# Altium PCB PCB-Jammer.PcbDoc
Units mm, origin at the board's own origin, x right, y up, seen from the top; angles counter-clockwise.
Board outline 140 x 250 mm, 2 copper layers (Top Layer, Bottom Layer); 89 components, 39 nets, 339 pads, 15 vias.
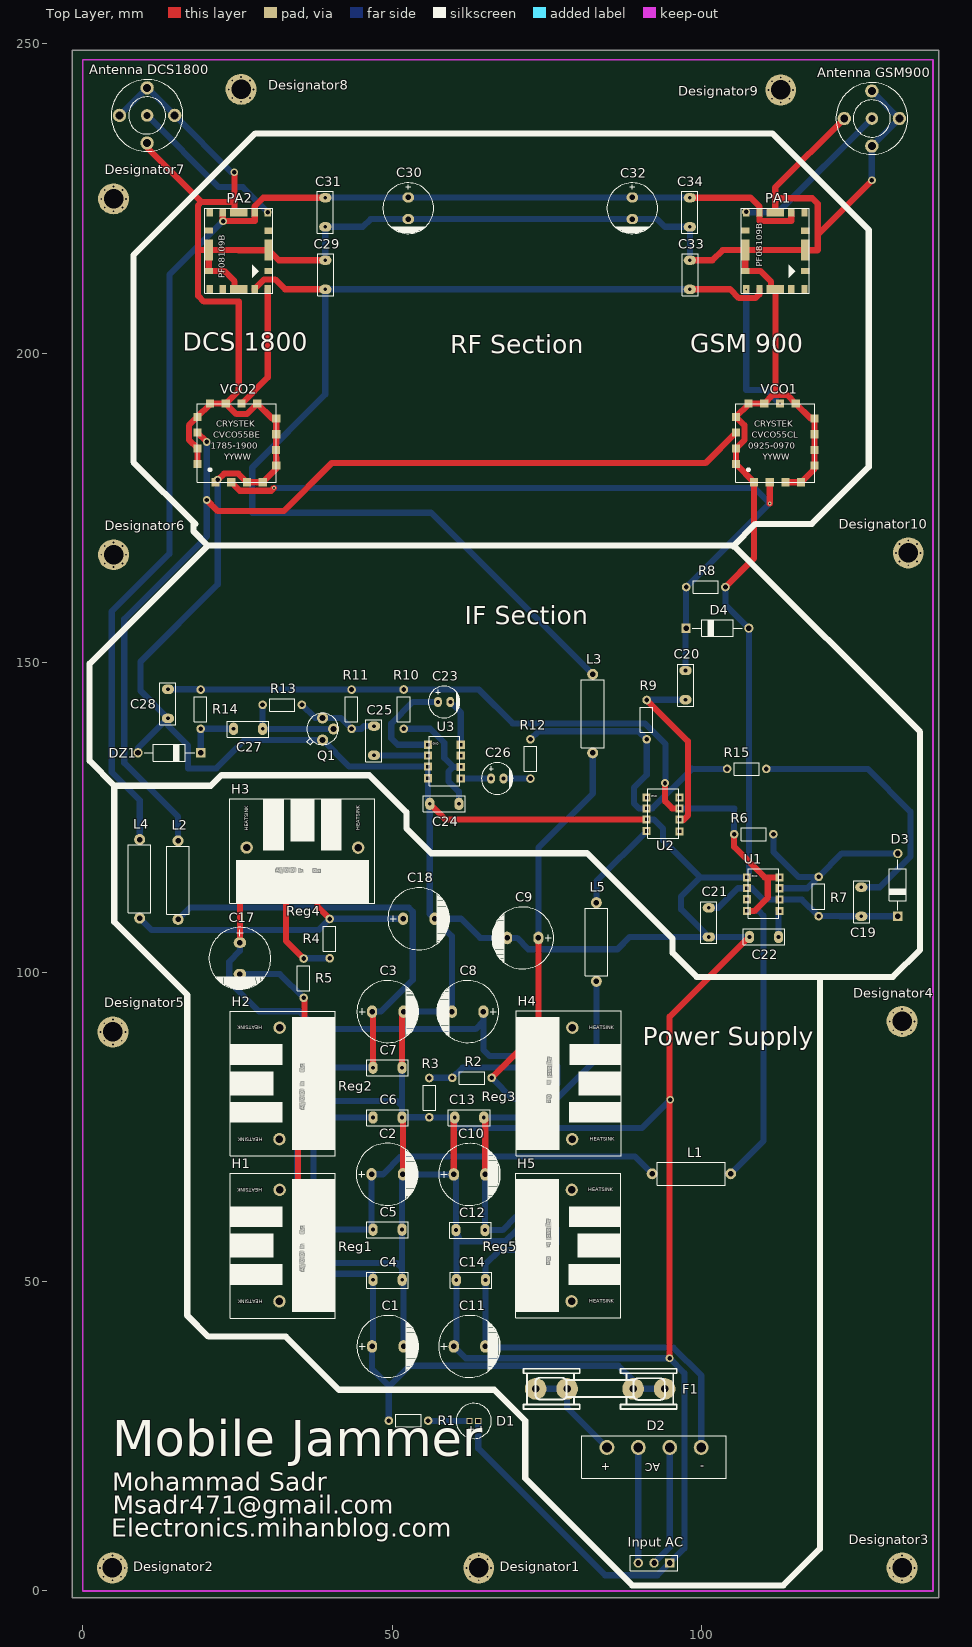
[diagram p0: Top Layer view]
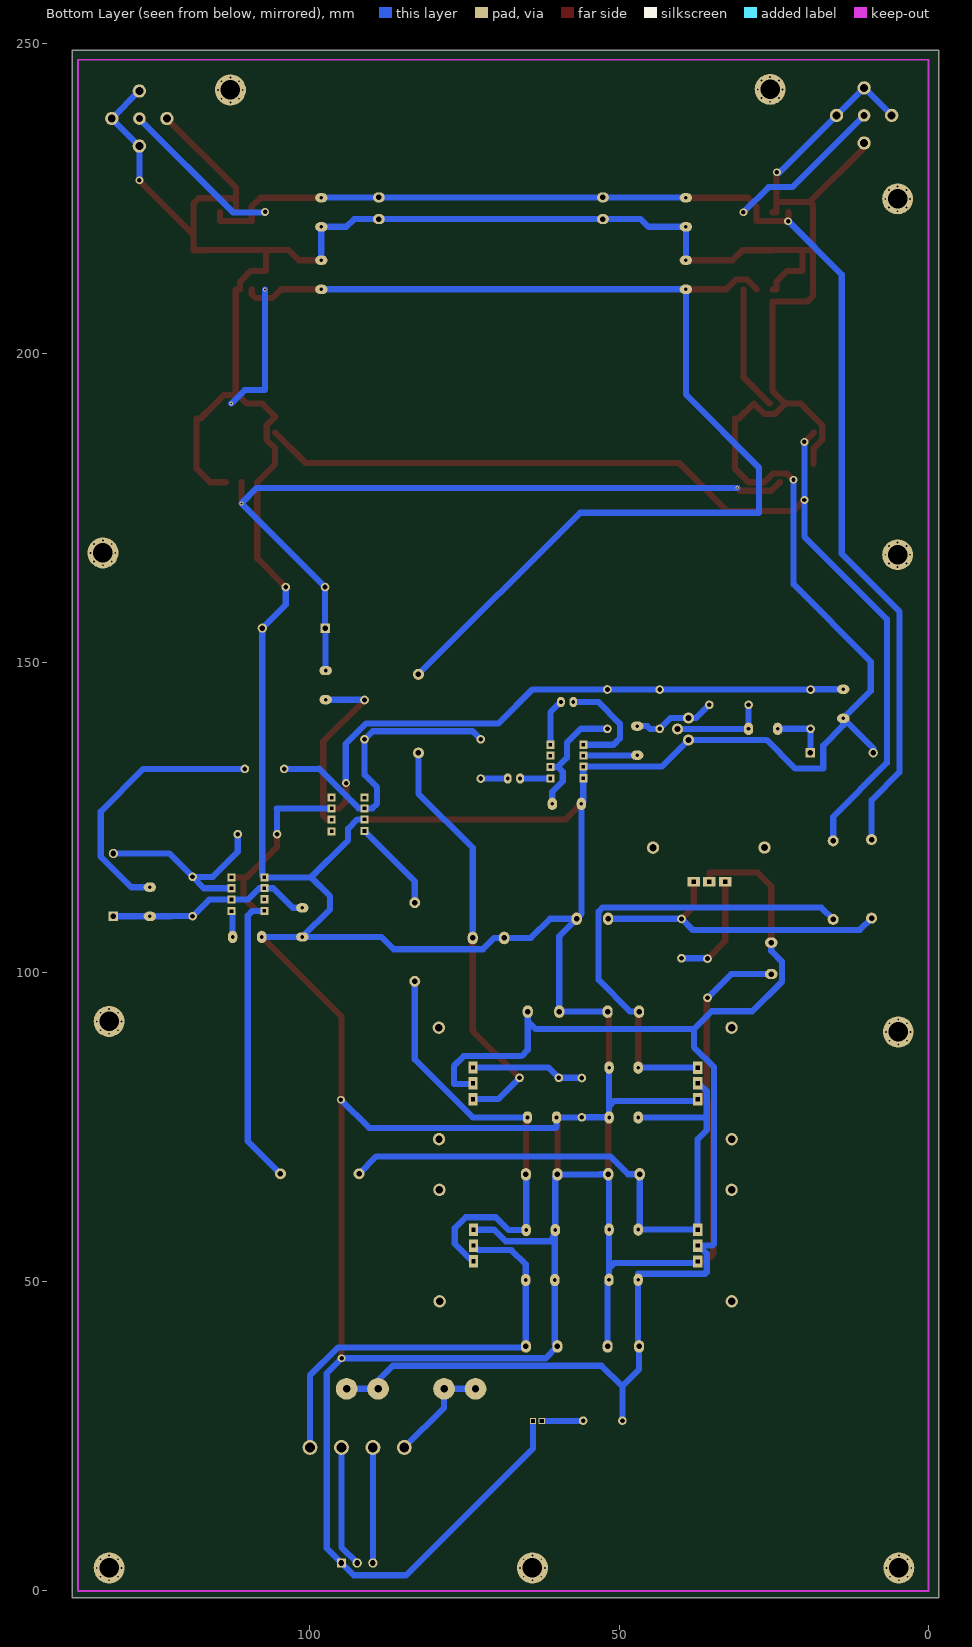
[diagram p1: Bottom Layer view, seen from below]
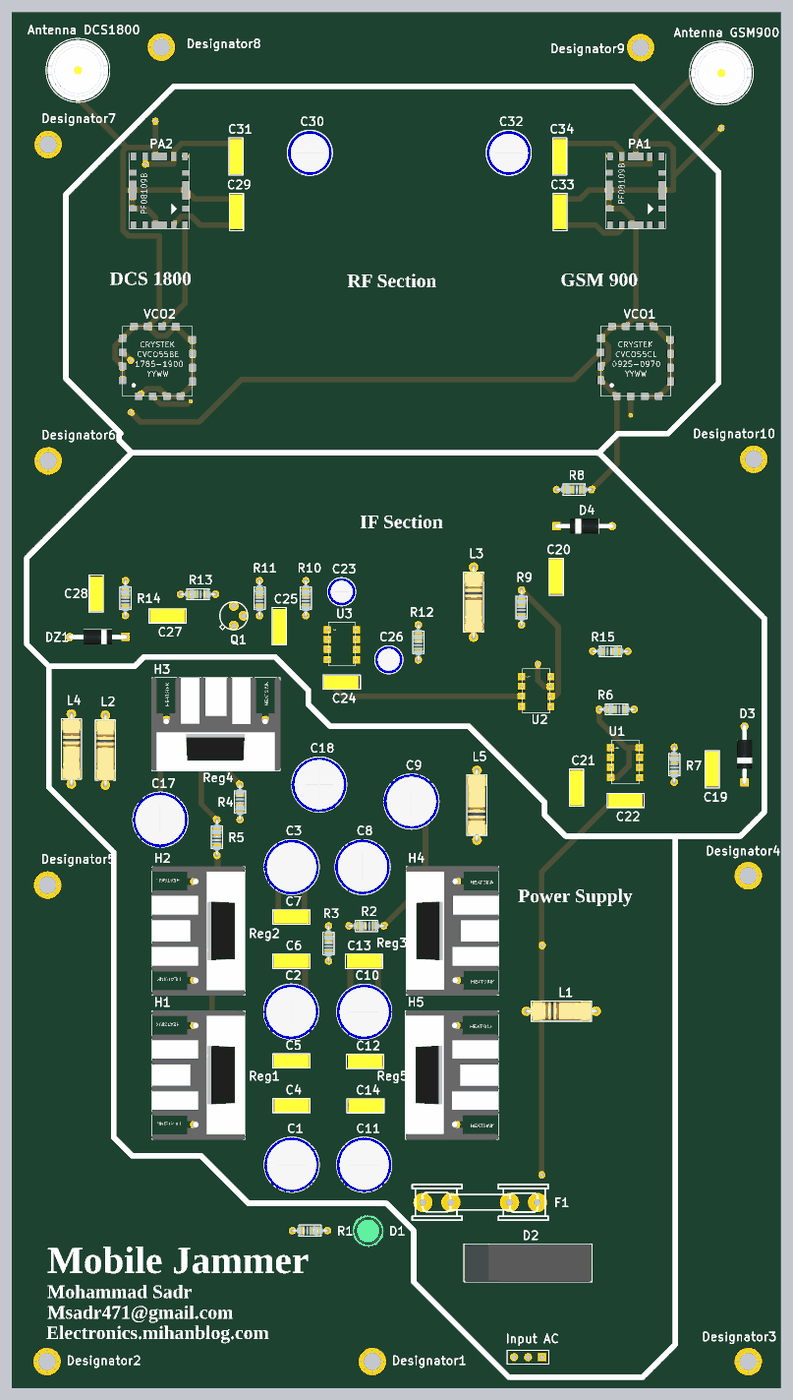
[diagram p2: 3D render of the assembled board from above, using the file's embedded part models]

## Layer stack, top to bottom
Top Solder: solder mask 0.0102, Solder Resist, Dk 3.5
Top Layer: signal copper 0.0356
Dielectric 1: dielectric 0.32, FR-4, Dk 4.8
Bottom Layer: signal copper 0.0356
Bottom Solder: solder mask 0.0102, Solder Resist, Dk 3.5

## Board outline
-1.674,-1.086 138.326,-1.086 138.326,248.914 -1.674,248.914

## Design rules (kind name [scope] priority, off if disabled: settings)
Clearance [All] p1: gap=0.2
PolygonConnect [All] p1: connectstyle=Relief reliefconductorwidth=0.254 reliefentries=4 polygonreliefangle="45 Angle" airgapwidth=0.254
RoomDefinition Jammer2 [InComponentClass('Jammer2')] p1: confinementstyle=ConfineIn formatcopy=TRUE lockcomponents=FALSE outline -0.214,-0.186 137.586,-0.186 137.586,247.614 -0.214,247.614
RoutingCorners [All] p1: cornerstyle=Round minsetback=3 maxsetback=3
RoutingPriority [All] p1: routingpriority=1
RoutingVias [All] p1: holewidth=0.3 width=0.6 viastyle="Through Hole" minholewidth=0.711 minwidth=1.27 maxholewidth=0.711 maxwidth=1.27
SMDNeckDown [All] p1: percent=100.000
SolderMaskExpansion [All] p1: expansion=0.102 useseparateexpansions=TRUE expansionbottom=0.102
Width [All] p1: maxlimit=1 minlimit=1 preferedwidth=1 minimp=50.000000 maximp=50.000000 favimp=50.000000
28 further rules are at their usual default settings.

## Classes and differential pairs
component class Jammer2: "Antenna DCS1800" "Antenna GSM900" C1 C3 C4 C5 C6 C7 C8 C9 C11 C12 C13 C14 C17 C18 C19 C20 C21 C22 C23 C24 C25 C26 C27 C28 C29 C30 C31 C32 C33 C34 D1 D2 D3 D4 DZ1 F1 H1 H2 H3 H4 H5 "Input AC" L1 L2 L3 L4 L5 PA1 PA2 Q1 R1 R2 R3 R4 R5 R6 R7 R8 R9 R10 R11 R12 R13 R14 R15 Reg1 Reg2 Reg3 Reg4 U1 U2 U3 VCO1 VCO2

## Components (designator, comment, footprint, x,y, rotation, side; value= is the part's Value field where it differs from the comment)
"Antenna DCS1800" "DCS1800" "BNC - Connector" 10.4,238.4 r90 top
"Antenna GSM900" "GSM900" "BNC - Connector" 127.5,237.9 r90 top
C1 "2200uF" "cap 04" 49.3,39.5 r180 top
C2 "2200uF" "cap 04" 49.2,67.322 r180 top
C3 "2200uF" "cap 04" 49.3,93.6 r180 top
C4 "330nF" "Cap - 100nF - 2" 46.91,50.27 r0 top
C5 "100nF" "Cap - 100nF - 2" 46.9,58.38 r0 top
C6 "330nF" "Cap - 100nF - 2" 46.9,76.5 r0 top
C7 "100nF" "Cap - 100nF - 2" 46.9,84.55 r0 top
C8 "100uF" "cap 04" 62.2,93.6 r0 top
C9 "100uF" "cap 04" 71.1,105.5 r0 top
C10 "2200uF" "cap 04" 62.5,67.3 r180 top
C11 "2200uF" "cap 04" 62.5,39.5 r180 top
C12 "100nF" "Cap - 100nF - 2" 60.3,58.3 r0 top
C13 "330nF" "Cap - 100nF - 2" 60.1,76.5 r0 top
C14 "330nF" "Cap - 100nF - 2" 60.37,50.23 r0 top
C17 "100uF" "cap 04" 25.4,102.2 r90 top
C18 "100uF" "cap 04" 54.3,108.6 r180 top
C19 "100nF" "Cap - 100nF - 2" 125.8,109 r90 top
C20 "100nF" "Cap - 100nF - 2" 97.4,144 r90 top
C21 "100nF" "Cap - 100nF - 2" 101.17,110.37 r270 top
C22 "10nF" "Cap - 100nF - 2" 112.43,105.67 r180 top
C23 "10uF" "cap 01" 58.39,143.63 r180 top
C24 "100nF" "Cap - 100nF - 2" 60.78,127.17 r180 top
C25 "100nF" "Cap - 100nF - 2" 47.06,139.73 r270 top
C26 "10uF" "cap 01" 66.98,131.27 r180 top
C27 "100nF" "Cap - 100nF - 2" 24.37,139.29 r0 top
C28 "100nF" "Cap - 100nF - 2" 13.77,145.68 r270 top
C29 "1nF" "Cap - 100nF - 2" 39.2,210.3 r90 top
C30 "470uF" "cap 03" 52.6,223.4 r90 top
C31 "100nF" "Cap - 100nF - 2" 39.2,225.1 r270 top
C32 "470uF" "cap 03" 88.8,223.4 r90 top
C33 "1nF" "Cap - 100nF - 2" 98.1,210.3 r90 top
C34 "100nF" "Cap - 100nF - 2" 98.1,225.1 r270 top
D1 "LED" "GREEN LED 5mm" 63.196,27.464 r270 top
D2 "Diode Bridge" "Diode Bridge" 92.31,23.184 r180 top
D3 "1N4007" DO-41 131.7,109 r270 top
D4 "1N4007" DO-41 97.48,155.56 r180 top
Designator1 "Comment" "Board Screw_No Silk" 63.986,3.714 r0 top
Designator2 "Comment" "Board Screw_No Silk" 4.786,3.714 r0 top
Designator3 "Comment" "Board Screw_No Silk" 132.386,3.714 r0 top
Designator4 "Comment" "Board Screw_No Silk" 132.386,92.014 r0 top
Designator5 "Comment" "Board Screw_No Silk" 4.886,90.314 r0 top
Designator6 "Comment" "Board Screw_No Silk" 4.986,167.414 r0 top
Designator7 "Comment" "Board Screw_No Silk" 4.986,224.914 r0 top
Designator8 "Comment" "Board Screw_No Silk" 25.586,242.614 r0 top
Designator9 "Comment" "Board Screw_No Silk" 112.786,242.514 r0 top
Designator10 "Comment" "Board Screw_No Silk" 133.386,167.714 r0 top
DZ1 "6.8V" DO-41 19.08,135.42 r0 top
F1 "FUSE" FUSE_1 78.266,32.654 r0 top
H1 "Heatsink" "Heatsink 2PIN" 31.8,55.8 r90 top
H2 "Heatsink" "Heatsink 2PIN" 31.8,82 r90 top
H3 "Heatsink" "Heatsink 2PIN" 35.5,120.1 r0 top
H4 "Heatsink" "Heatsink 2PIN" 79.1,82 r270 top
H5 "Heatsink" "Heatsink 2PIN" 79,55.8 r270 top
"Input AC" "Input AC" HDR1X3 94.85,4.515 r180 top
L1 "100uH" Res-(1/1) 92,67.4 r0 top
L2 "100uH" Res-(1/1) 15.4,121.2 r270 top
L3 "100uH" Res-(1/1) 82.4,148.1 r270 top
L4 "100uH" Res-(1/1) 9.2,121.4 r270 top
L5 "100uH" Res-(1/1) 83,98.5 r90 top
PA1 "PF08109B" RF-O-12 111.9,216.5 r90 top
PA2 "PF08109B" RF-O-12 25.2,216.5 r90 top
Q1 "2N2222A" TO52 38.76,139.27 r270 top
R1 "1K" Res-(1/4) 52.626,27.514 r0 top
R2 "100R" Res-(1/4) 62.9,82.9 r180 top
R3 "180R" Res-(1/4) 56,79.7 r90 top
R4 "160R" Res-(1/4) 39.9,105.4 r270 top
R5 "148R" Res-(1/4) 35.7,99 r90 top
R6 "700R" Res-(1/4) 108.426,122.264 r180 top
R7 "700R" Res-(1/4) 118.9,112.2 r90 top
R8 "82K" Res-(1/4) 100.67,162.2 r180 top
R9 "2K" Res-(1/4) 91.12,140.77 r90 top
R10 "10R" Res-(1/4) 51.87,142.47 r90 top
R11 "2K" Res-(1/4) 43.44,142.46 r90 top
R12 "1K" Res-(1/4) 72.34,134.43 r90 top
R13 "33K" Res-(1/4) 32.24,143.17 r180 top
R14 "2K" Res-(1/4) 19.05,142.46 r90 top
R15 "2K" Res-(1/4) 107.286,132.814 r0 top
Reg1 "L7812" TO-220 37.3,55.8 r90 top
Reg2 "L7805" TO-220 37.3,82 r90 top
Reg3 "LM317" TO-220 73.6,82 r270 top
Reg4 "LM317" TO-220 35.4,114.6 r0 top
Reg5 "L7912" TO-220 73.5,55.8 r270 top
U1 "NE555" DIP8 107.3,115.3 r0 top
U2 "LM741-UA741" DIP8 91.12,128.2 r0 top
U3 "LM386" DIP8 55.77,136.73 r0 top
VCO1 "CVCO55CL" CVCO55CL 111.9,185.5 r0 top
VCO2 "CVCO55BE" CVCO55BE 24.9,185.5 r0 top

## Footprints (in the part's own frame and the unit in brackets; to place one, negate y for a bottom-side part, rotate by r counter-clockwise, add the part's x,y. Pads: shape width x height; smd on the part's side, far side on the other; paste and mask are expansions set on the pad)
"BNC - Connector" [mil]
  round 80 hole 45: 1(0,0)
  round 85 hole 50: 2(-175.2,0) 2(0,175.2) 2(0,-175.2) 2(175.2,0)
  silkscreen extent -228,-228 228,228, body extent -218,-218 218,218, height 538
"Board Screw_No Silk" [mm]
  round 0.6 hole 0.3: S(-2,0) S(-1.414,-1.414) S(-1.414,1.414) S(0,-2) S(0,2) S(1.414,-1.414) S(1.414,1.414) S(2,0)
  round 5 hole 3.15 mask+0.1: S(0,0)
"cap 01" [mm]
  oval 1.27x1.651 hole 0.635: 1(1,0) 2(-1,0)
  silkscreen extent -2.55,-2.55 2.55,2.55, body extent -2.53,-2.53 2.53,2.53, height 12.54
"cap 03" [mil]
  oval 65x75 hole 35: 1(68.9,0) 2(-68.9,0)
  silkscreen extent -161,-161 161,161, body extent -159,-159 157,158, height 473
"cap 04" [mil]
  oval 65x80 hole 35: 1(100,0) 2(-100,0)
  silkscreen extent -197,-197 197,197, body extent -198,-197 198,199, height 513
"Cap - 100nF - 2" [mm]
  oval 1.5x2 hole 0.6: 1(0,0) 2(4.7,0)
  silkscreen extent -1.02,-1.33 5.72,1.24, body extent -0.75,-1.2 5.55,1.2, height 6.84
CVCO55BE [mm] "CVCO55BE-voltage controlled oscillator"
  rect 1.32x1.32 smd: 1(-3.44,-6.36) 2(-0.9,-6.36) 3(1.64,-6.36) 4(4.18,-6.36) 5(6.36,-3.68) 6(6.35,-1.15) 7(6.36,1.39) 8(6.36,3.93) 9(3.3,6.35) 10(0.76,6.35) 11(-1.78,6.35) 12(-4.32,6.36) 13(-6.36,4.19) 14(-6.36,1.65) 15(-6.34,-0.89) 16(-6.34,-3.44)
  silkscreen extent -6.36,-6.35 6.35,6.35
CVCO55CL [mm] "CVCO55CL-voltage controlled oscillator"
  rect 1.32x1.32 smd: 1(-3.44,-6.36) 2(-0.9,-6.36) 3(1.64,-6.36) 4(4.18,-6.36) 5(6.36,-3.68) 6(6.35,-1.15) 7(6.36,1.39) 8(6.36,3.93) 9(3.3,6.35) 10(0.76,6.35) 11(-1.78,6.35) 12(-4.32,6.36) 13(-6.36,4.19) 14(-6.36,1.65) 15(-6.34,-0.89) 16(-6.34,-3.44)
  silkscreen extent -6.36,-6.35 6.35,6.35
"Diode Bridge" [mil]
  round 95 hole 62: 1(300,0) 2(-100,0) 3(-300,0) 4(100,0)
  silkscreen extent -460,-75 460,195, body extent -455,-75 458,195, height 760
DIP8 [mm] "8PIN"
  rect 1.3x1.3 hole 0.5 square: 1(0,-0.013) 2(0,-1.758) 3(0,-3.541) 4(0,-5.42) 5(5.309,-5.461) 6(5.309,-3.586) 7(5.309,-1.768) 8(5.309,-0.013)
  silkscreen extent 0.19,-6.6 5.17,1.4, body extent -0.12,-6.6 5.45,1.4, height 3.47
DO-41 [mm] "Diode"
  round 1.5 hole 0.9: 1(-10.15,0)
  rect 1.5x1.5 hole 0.9: 2(0,0)
  silkscreen extent -9.11,-1.35 -0.97,1.35, body extent -10.58,-1.36 0.44,1.36, height 3.12
FUSE_1 [mm]
  round 3.5 hole 1.2: 1(0,0) 2(10.668,0) ""(-5.08,0) ""(15.748,0)
  silkscreen extent -7.04,-3.25 17.7,3.25
"GREEN LED 5mm" [mm] "GREEN LED 5mm"
  rect 1x1 hole 0.6 square: 1(0,-0.7) 2(0,0.7)
  silkscreen extent -2.84,-2.83 2.84,2.84, body extent -2.9,-2.9 2.9,2.9, height 13.5
HDR1X3 [mm] "Connector; Header; 3 Position"
  rect 1.5x1.5 hole 0.9: 1(0,0)
  round 1.5 hole 0.9: 2(2.54,0) 3(5.08,0)
  silkscreen extent -1.27,-1.27 6.35,1.27
"Heatsink 2PIN" [mm] "Heatsink"
  round 2 hole 1.2: ""(-9.005,0.015) ""(9.005,-0.015)
  silkscreen extent -11.71,-9.03 11.68,7.95, body extent -11.77,-9.03 11.73,7.98, height 25
Res-(1/1) [mil]
  round 70 hole 35: 1(0,0) 2(500,0)
  silkscreen extent 34,-72 466,72, body extent -10,-71 514,73, height 151
Res-(1/4) [mil]
  round 55 hole 30: 1(-125,0) 2(125,0)
  silkscreen extent -80,-40 80,40, body extent -135,-36 135,36, height 115
RF-O-12 [mm] "Power Amplifier"
  rect 1x1.4 smd: 1(-3.23,-4.85) 2(3.27,-4.85) 7(3.3,4.85) 8(-3.22,4.85)
  rect 1.4x1 smd: 3(6.26,-4.7) 4(6.26,-2.59) 5(6.25,2.57) 6(6.25,4.68) 9(-6.21,4.68) 10(-6.22,2.57) 11(-6.22,-2.59) 12(-6.22,-4.7)
  rect 3.4x1.4 smd: G1(0.12,-4.85) G3(0.14,4.85)
  rect 1.4x2.8 smd: G2(-6.22,-0.02) G4(6.26,-0.02)
  silkscreen extent -6.87,-5.5 6.89,5.5
TO52 [mm]
  round 1.8 hole 1: 1(1.778,0) 2(0,1.778) 3(-1.778,0)
  silkscreen extent -2.54,-2.54 2.54,2.54
TO-220 [mm] "Voltage Regolator"
  rect 2x1.5 hole 0.62 square: 1(-2.565,0) 2(0,0) 3(2.54,0)
  silkscreen extent -5.33,-1.65 5.31,3.23, body extent -5.34,-1.61 5.34,3.22, height 22.61

## Part data
"Antenna DCS1800": library part BNC, "Antenna DCS1800"
"Antenna GSM900": library part BNC, "Antenna GSM900"
C1 C2 C3 C8 C9 C10 C11 C17 C18 C23 C26 C30 C32: library part Cap-Polar, "Capacitor Electrolytic"
C4 C5 C6 C7 C12 C13 C14 C19 C20 C21 C22 C24 C25 C27 C28: library part Cap-Bipolar, "Capacitor Ceramic"
C29 C31 C33 C34: library part Cap-Bipolar, "Capacitor ceramic"
D1: library part "LED Full color"
D2: "Full Wave Diode Bridge"
D3 D4: "Rectifiers"
DZ1: library part 1N4728A, "Diode Zener"
"Input AC": library part "Header 3", "Header, 3-Pin"
L1 L2 L3 L4 L5: library part "Inductor Iron", "Magnetic-Core Inductor"
PA1 PA2: library part "Power Amplifier", "Power Amplifier"
Q1: "NPN Transistor_Created by DESIGNER (M.Hariri)"
R1 R2 R3 R4 R5: library part Resistor, "Resistor"
R6 R7 R8 R9 R10 R11 R12 R13 R14 R15: library part Resistor, "Resistor 1/4W"
Reg1 Reg2 Reg3 Reg4 Reg5: library part "Voltage Regulator", "TO-220"
U1: "GENERAL PURPOSE SINGLE BIPOLAR TIMERS"
U2: "(OP-AMP)"
U3: "Audio Amplifier"
VCO1: library part CVCO055CL, "SMD"
VCO2: library part CVCO055BE, "SMD"

## Via types
v1: diameter 1.27, hole 0.711, Top Layer to Bottom Layer, 11 vias
v2: diameter 0.6, hole 0.3, Top Layer to Bottom Layer, 4 vias

## Nets (pads, with @x,y where several pads share a name; then routed paths per layer and width w, separated by ;. In a path a pad name is that pad's centre, name@x,y a point inside that pad or via, vN(x,y) a via of type N, cw(c..) or ccw(c..) an arc to the next point about the centre after c; other vN are vias at no path point)
GND: "Antenna DCS1800.2" "Antenna GSM900.2" "Input AC.1" C1.2 C2.2 C3.2 C4.2 C5.2 C6.2 C7.2 C8.2 C9.2 C10.1 C11.1 C12.1 C13.1 C14.1 C17.2 C18.2 C21.2 C22.2 C24.2 C28.2 C29.2 C30.2 C31.2 C32.2 C33.2 C34.2 D1.2 D4.1 DZ1.1 PA1.8 PA1.G1 PA1.G2 PA1.G3 PA1.G4 PA2.8 PA2.G1 PA2.G2 PA2.G3 PA2.G4 Q1.1 R3.1 R5.1 R8.1 Reg1.1 Reg2.1 Reg5.1 U1.1 U2.3 U3.3 U3.4 VCO1.1 VCO1.3 VCO1.4 VCO1.5 VCO1.6 VCO1.7 VCO1.8 VCO1.9 VCO1.11 VCO1.12 VCO1.13 VCO1.15 VCO1.16 VCO2.1 VCO2.3 VCO2.4 VCO2.5 VCO2.6 VCO2.7 VCO2.8 VCO2.9 VCO2.11 VCO2.12 VCO2.13 VCO2.15 VCO2.16 | length 1179.3
  Top Layer w1: 10.4,233.95 10.4,233.2 19.186,224.414 ; VCO2.16 VCO2.15 17.166,186.004 17.166,188.316 VCO2.13 20.58,191.73 VCO2.12 ; VCO2.12@20.58,191.87 VCO2.11 ; VCO2.1@21.83,179.51 22.858,180.538 25.142,180.538 VCO2.3 VCO2.4 31.26,181.32 VCO2.5 31.26,183.079 ; v1@24.532,229.214 24.532,224.414 ; PA2.G2 24.532,210.28 24.532,211.578 22.83,213.28 PA2.8 PA2.G3 ; PA2.G4 24.532,222.76 24.532,224.414 ; 31.25,183.089 VCO2.6 31.25,185.593 ; 31.26,185.603 VCO2.7 VCO2.8 30.62,189.43 VCO2.9 26.49,190.14 24.83,190.14 VCO2.11 ; R5.1 35.835,95.825 35.835,80.715 Reg2.1@37.208,79.342 ; Reg1.1 35.975,53.235 34.786,54.424 34.786,78.104 35.876,79.194 37.06,79.194 Reg2.1@37.208,79.342 ; Reg2.1 Reg2.1@37.208,79.342 ; C29.2 31.67,215 PA2.G1 25.187,216.62 25.167,216.64 PA2.G3 ; C2.2@51.6,67.461 C2.2 51.74,76.36 C6.2 ; C7.2 51.6,93.36 C3.2 ; C24.2 58.591,124.659 U2.3 ; C10.1 59.96,76.36 C13.1 ; Reg5.1@73.5,58.111 Reg5.1 ; v1(94.826,37.584) 94.826,92.766 C22.2 C22.2@107.816,105.584 ; C33.2 101.748,215 103.388,216.64 PA1.G3 ; R8.1 108.46,166.815 VCO1.1 105.56,182.04 VCO1.16 VCO1.15 106.904,185.954 106.904,188.326 VCO1.13 107.58,191.73 VCO1.12 108.834,191.86 108.844,191.85 VCO1.11 111.502,193.232 111.92,193.232 ; PA1.G4 111.908,222.76 111.908,224.536 ; VCO1.3 VCO1.4 118.26,181.32 VCO1.5 118.26,183.079 ; PA1.G1 118.722,216.62 ; PA1.G1@116.75,216.64 PA1.G3 ; 118.25,183.089 VCO1.6 118.25,185.593 ; 118.26,185.603 VCO1.7 VCO1.8 117.62,189.43 VCO1.9 113.818,193.232 111.92,193.232 ; 118.759,216.657 118.759,219.114 ; 123.05,237.9 111.908,226.758 111.908,224.536 ; v1(127.5,227.928) 127.5,227.855 118.759,219.114 ; 18.639,216.64 18.639,209.261 19.586,208.314 25.22,208.314 25.22,193.95 VCO2.11 ; 18.639,216.64 18.639,223.867 19.186,224.414 ; 18.639,216.64 PA2.G3 ; 19.186,224.414 24.532,224.414 ; PA1.G3 PA1.8 109.469,213.28 111.222,211.527 111.222,210.28 PA1.G2 111.92,193.232 ; 111.908,224.536 112.386,225.014 117.886,225.014 118.759,224.141 118.759,219.114
  Bottom Layer w1: 5.95,238.4 10.4,242.85 14.85,238.4 24.036,229.214 v1(24.486,229.214) ; DZ1.1 8.93,136.14 C28.2@13.762,140.972 ; v1(21.806,179.534) 21.806,162.614 9.336,150.144 9.336,145.414 C28.2 ; C17.2 31.865,99.66 R5.1 ; Reg1.1 37.3,52.98 50.77,52.98 51.61,52.14 ; Reg2.1 37.3,79.167 50.77,79.167 51.6,78.337 ; C29.2 C31.2 45.258,220.4 46.508,221.65 C30.2 C32.2 92.807,221.65 94.057,220.4 C34.2 C33.2 ; C7.2 51.6,78.337 ; C1.2 51.84,50.04 C4.2 51.61,52.14 ; C3.2 C8.2 59.66,105.78 C18.2 ; D1.2 63.896,23.034 84.406,2.524 92.859,2.524 94.85,4.515 97.226,6.891 97.226,35.184 v1(94.826,37.584) 61.876,37.584 C11.1 60.37,39.91 C14.1 C12.1@60.37,58.1 ; Reg5.1 70.176,58.365 68.296,56.485 60.935,56.485 C12.1@60.37,58.1 ; U2.3 92.273,124.659 93.772,123.16 93.772,121.28 99.765,115.287 ; v1(94.936,79.364) 90.372,74.8 60.25,74.8 60.1,74.95 C13.1 56.025,76.5 R3.1 51.625,76.525 C6.2 51.6,78.337 ; R8.1 103.845,159.345 D4.1 107.63,115.617 U1.1 99.765,115.287 ; C22.2 C21.2 ; v1(127.5,227.928) 127.5,233.45 131.95,237.9 127.5,242.35 ; C28.2@13.762,140.972 13.762,140.98 C28.2 ; C28.2@13.762,140.972 13.762,139.848 17.016,136.594 17.016,132.904 21.576,132.904 26.164,137.492 Q1.1 43.063,133.189 U3.3 U3.4 55.77,127.48 C24.2 56.08,109.36 C18.2 ; C28.2@13.762,140.972 C28.2 ; 51.61,52.14 51.61,58.37 C5.2 51.6,67.182 C2.2 53.081,67.322 53.103,67.3 C10.1 60.3,66.96 C12.1 60.37,58.23 C12.1@60.37,58.1 ; C18.2 61.133,108.6 64.233,105.5 C9.2 70.176,105.5 71.997,103.678 86.406,103.678 88.398,105.67 C21.2 ; 99.765,115.287 96.686,112.208 96.686,110.154 C21.2
"NetAntenna DCS1800_1": "Antenna DCS1800.1" PA2.3 | length 26
  Bottom Layer w1: 10.4,238.4 21.986,226.814 25.846,226.814 v1(29.9,222.76)
"NetAntenna GSM900_1": "Antenna GSM900.1" PA1.6 | length 26.6
  Bottom Layer w1: v1@107.186,222.714 112.314,222.714 127.5,237.9
  other v1: 107.186,222.806
NetC1_1: C1.1 C4.1 C8.1 C17.1 F1.2 F1.@94.014,32.654 R1.1 Reg1.2 Reg3.2 Reg4.2 | length 228
  Top Layer w1: C17.1 25.4,113.868 27.605,116.073 35.403,116.073 35.403,114.6 Reg4.2 ; Reg3.2 Reg3.2@73.6,82.241
  Bottom Layer w1: C17.1 25.4,103.399 23.668,101.667 23.668,98.446 28.469,93.645 35.022,93.645 37.892,90.775 ; Reg1.2@36.866,55.544 35.835,54.513 35.835,51.481 36.063,51.253 46.91,51.253 C4.1 46.91,39.65 C1.1 46.76,35.781 49.5,33.041 ; Reg1.2 34.898,55.8 34.635,56.063 34.635,84.615 37.892,87.872 37.892,90.775 ; R1.1 49.451,32.992 49.5,33.041 ; Reg3.2 73.686,81.914 76.686,81.914 76.686,84.814 75.086,86.414 65.746,86.414 64.74,87.42 C8.1 64.74,92.045 63.47,90.775 37.892,90.775 ; F1.@94.014,32.654 F1.2 88.934,34.016 86.566,36.384 52.843,36.384 49.5,33.041
NetC2_1: C2.1 C5.1 C6.1 L1.1 Reg1.3 Reg2.2 | length 102.3
  Bottom Layer w1: Reg2.2@37.096,81.974 35.835,80.713 35.835,76.78 ; C6.1 36.114,76.5 35.835,76.78 ; L1.1 89.199,70.201 51.414,70.201 48.535,67.322 C2.1 46.66,58.62 C5.1 37.34,58.38 Reg1.3 37.3,73 35.835,74.465 35.835,76.78
NetC3_1: C3.1 C7.1 L2.2 Reg2.3 | length 77.4
  Top Layer w1: C3.1 46.9,93.46 C7.1
  Bottom Layer w1: L2.2 17.309,110.409 52.675,110.409 53.31,109.774 53.31,98.725 48.185,93.6 C3.1 ; Reg2.3 37.31,84.55 C7.1
NetC9_1: C9.1 L3.2 R2.1 Reg3.3 | length 68.2
  Top Layer w1: R2.1 73.64,90.465 C9.1 ; Reg3.3@73.6,79.447 Reg3.3
  Bottom Layer w1: R2.1 69.515,79.46 Reg3.3 ; C9.1 73.64,120.068 82.4,128.828 L3.2
NetC10_2: C10.2 C12.2 C13.2 L5.1 Reg5.3 | length 72.9
  Top Layer w1: C13.2 65.04,76.26 C10.2
  Bottom Layer w1: C13.2 73.63,76.5 83,85.87 L5.1 ; C10.2 65,67.26 C12.2 67.832,58.3 69.916,60.384 74.766,60.384 76.536,58.614 76.536,56.096 73.7,53.26 Reg5.3
NetC11_2: C11.2 C14.2 D2.3 Reg5.2 | length 71.5
  Bottom Layer w1: C11.2 65.04,39.731 C11.2@65.07,39.731 ; Reg5.2 72.774,55.074 67.376,55.074 65.07,52.768 C14.2 C11.2@65.07,39.731 ; D2.3 99.93,34.81 95.426,39.314 65.487,39.314 C11.2@65.07,39.731
NetC18_1: C18.1 L4.2 R4.1 Reg4.3 | length 50.9
  Top Layer w1: Reg4.3 37.94,110.535 R4.1
  Bottom Layer w1: L4.2 11.098,106.802 38.127,106.802 R4.1 39.925,108.6 C18.1
NetC19_1: C19.1 C21.1 D3.2 R7.1 U1.2 U1.6 | length 33.7
  Bottom Layer w1: C21.1 102.688,110.37 105.86,113.542 U1.2 108.123,113.542 109.952,111.714 U1.6 116.211,111.714 R7.1 122.322,109.025 122.347,109 C19.1 D3.2
NetC19_2: C19.2 R15.2 | length 43.4
  Bottom Layer w1: R15.2 126.846,132.814 133.736,125.924 133.736,118.644 128.792,113.7 C19.2
NetC20_1: C20.1 R9.2 U2.6 | length 29.4
  Top Layer w1: R9.2 97.785,137.28 97.785,125.274 97.125,124.614 U2.6
  Bottom Layer w1: R9.2 91.175,144 C20.1
NetC20_2: C20.2 D4.2 R8.2 VCO1.2 VCO2.2 | length 124.9
  Top Layer w1: VCO2.2 25.37,177.77 30.45,177.77 v2(30.907,178.227) ; v2(111,175.705) VCO1.2
  Bottom Layer w1: v2(30.907,178.227) 108.517,178.227 v2(111,175.705) R8.2 97.48,162.185 D4.2 97.4,155.48 C20.2
NetC22_1: C22.1 U1.5 | length 4.2
  Bottom Layer w1: C22.1 112.43,109.66 U1.5
NetC23_1: C23.1 U3.1 | length 17.7
  Bottom Layer w1: U3.1 50.893,136.717 49.856,137.754 49.856,140.134 53.352,143.63 C23.1
NetC23_2: C23.2 U3.8 | length 7.6
  Bottom Layer w1: C23.2 61.079,141.941 U3.8
NetC24_1: C24.1 R10.1 U3.6 | length 20.2
  Bottom Layer w1: R10.1 56.149,139.295 58.415,137.028 58.415,134.59 59.862,133.143 ; C24.1 60.78,129.12 59.086,130.814 59.086,132.367 59.862,133.143 ; U3.6 59.862,133.143
NetC25_1: C25.1 Q1.3 R11.1 R13.1 | length 13.4
  Bottom Layer w1: R13.1 37.537,141.048 Q1.3 41.677,141.048 R11.1 45.004,139.285 45.449,139.73 C25.1
NetC25_2: C25.2 U3.2 | length 8.7
  Bottom Layer w1: C25.2 47.118,134.972 U3.2
NetC26_1: C26.1 U3.5 | length 4.9
  Bottom Layer w1: U3.5 61.08,131.27 C26.1
NetC26_2: C26.2 R12.1 | length 4.4
  Bottom Layer w1: C26.2 67.995,131.255 R12.1
NetC27_1: C27.1 DZ1.2 R14.1 | length 9.2
  Top Layer w1: R14.1 R14.1@19.08,139.255
  Bottom Layer w1: DZ1.2 19.08,139.255 R14.1 19.055,139.29 C27.1
NetC27_2: C27.2 Q1.2 R13.2 | length 15.4
  Bottom Layer w1: R13.2 29.07,143.165 C27.2 29.09,139.27 Q1.2
NetC28_1: C28.1 L1.2 R6.2 R10.2 R11.2 R14.2 U1.4 U1.8 U2.7 | length 175.3
  Top Layer w1: v1(94.085,130.514) 94.085,127.567 95.22,126.432 U2.7 ; R6.2 105.251,120.219 110.183,115.287 111.059,115.287 ; U1.4 108.551,109.88 110.686,112.014 110.686,114.914 111.059,115.287 ; U1.8 111.059,115.287
  Bottom Layer w1: C28.1 19.005,145.68 R14.2 R11.2 51.86,145.635 R10.2 63.995,145.645 69.466,140.174 90.826,140.174 94.153,136.847 v1@94.153,130.446 ; U2.7 105.293,126.432 ; L1.2 109.986,72.686 109.986,109.114 109.22,109.88 U1.4 ; R6.2 105.251,126.39
NetC29_1: C29.1 C33.1 L3.1 PA1.10 PA2.11 | length 191.4
  Top Layer w1: PA2.11 27.79,210.36 29.344,211.914 31.086,211.914 32.7,210.3 C29.1 ; C33.1 104.6,210.3 106.015,208.885 108.695,208.885 109.33,209.52 PA1.10
  Bottom Layer w1: L3.1 56.286,174.214 27.386,174.214 27.386,181.514 39.2,193.328 C29.1 C33.1
NetC30_1: C30.1 C31.1 C32.1 C34.1 L4.1 PA1.4 PA1.5 PA2.4 PA2.5 | length 209.8
  Top Layer w1: v1@22.63,221.356 PA2.5 ; v1@22.676,221.356 27.79,221.356 PA2.4 27.79,223.71 29.18,225.1 C31.1 ; C34.1 107.92,225.1 109.33,223.69 PA1.5 109.33,221.356 114.49,221.356 PA1.4
  Bottom Layer w1: L4.1 9.2,127.76 4.686,132.274 4.686,158.254 14.006,167.574 14.006,212.694 22.616,221.304 v1(22.676,221.304) ; C31.1 39.25,225.15 C30.1 C32.1 98.05,225.15 C34.1
NetD1_1: D1.1 R1.2 | length 6.7
  Bottom Layer w1: R1.2 55.851,27.464 D1.1
NetD2_1: D2.1 F1.1 F1.@73.186,32.654 | length 17.2
  Bottom Layer w1: F1.@73.186,32.654 F1.1 78.266,29.608 D2.1
NetD2_2: "Input AC.2" D2.2 | length 19.7
  Bottom Layer w1: 92.31,4.515 94.85,7.055 D2.2
NetD2_4: "Input AC.3" D2.4 | length 18.7
  Bottom Layer w1: 89.77,4.515 D2.4
NetD3_1: D3.1 R6.1 R7.2 U1.7 | length 33.2
  Bottom Layer w1: R6.1 111.601,119.419 115.645,115.375 R7.2 ; U1.7 117.057,113.532 R7.2 ; D3.1 122.675,119.15 R7.2
NetL2_1: L2.1 VCO1.14 VCO2.14 | length 167
  Top Layer w1: VCO2.14 v1@19.934,185.756 ; v1(20.046,176.264) 21.826,174.484 32.496,174.484 40.252,182.24 100.63,182.24 VCO1.14
  Bottom Layer w1: L2.1 15.4,125.1 6.716,133.784 6.716,157.024 20.046,170.354 v1(20.046,176.264) v1(20.046,185.644)
NetL5_2: L5.2 U2.4 | length 14.9
  Bottom Layer w1: L5.2 83,114.66 U2.4
NetPA1_9: PA1.9 VCO1.10 | length 22.6
  Bottom Layer w1: v2(107.22,210.29) 107.22,194.014 110.496,194.014 v2(112.66,191.85)
NetPA2_12: PA2.12 VCO2.10 | length 20.2
  Top Layer w1: VCO2.10 29.886,196.076 29.886,210.266 PA2.12
NetR2_2: R2.2 R3.2 Reg3.1 | length 18.3
  Bottom Layer w1: R3.2 56.025,82.9 R2.2 61.39,84.565 Reg3.1
NetR4_2: R4.2 R5.2 Reg4.1 | length 17.8
  Top Layer w1: Reg4.1 32.835,105.04 R5.2
  Bottom Layer w1: R5.2 35.75,102.225 R4.2
NetR9_1: R9.1 R12.2 R15.1 U2.2 | length 49.1
  Bottom Layer w1: R12.2 73.649,138.914 89.801,138.914 R9.1 91.12,131.848 89.086,129.814 89.086,127.214 89.858,126.442 U2.2 92.045,126.442 98.465,132.863 98.514,132.814 R15.1
pads on no net: Designator1.S Designator2.S Designator3.S Designator4.S Designator5.S Designator6.S Designator7.S Designator8.S Designator9.S Designator10.S H1. H2. H3. H4. H5. PA1.1 PA1.2 PA1.3 PA1.7 PA1.11 PA1.12 PA2.1 PA2.2 PA2.6 PA2.7 PA2.9 PA2.10 U1.3 U2.1 U2.5 U2.8 U3.7

## Keep-outs
Keep-Out Layer:
  lines w0.3: 0,0 0,247.4 137.4,247.4 137.4,0 0,0

## Silkscreen, mask and mechanical layers (free items; w line width, h text height)
Top Overlay:
  lines w1: 8.2,184.6 8.2,215.8 27.9,235.5 111.4,235.5 127,219.9 127,181.6 117.8,172.4 108.7,172.4 105.1,168.8 ; 8.2,184.8 8.2,182.4 18.2,172.4 ; 17.9,172.4 17.9,171.2 20.2,168.9 ; 119.1,99.2 119.1,6.8 113.2,0.9 88.8,0.9 71.5,18.2 71.5,27.5 66.5,32.5 41.4,32.5 32.8,41.1 20.3,41.1 16.9,44.5 16.9,96.3 5.1,108.1 5.1,130.1 ; 5.1,130.1 1.1,134.1 1.1,149.8 20.2,168.9 ; 5.1,130.1 20.7,130.1 22.4,131.8 46.3,131.8 52.3,125.8 52.3,123.2 56.3,119.2 81.5,119.2 95.3,105.4 95.3,103.1 99.2,99.2 130.9,99.2 135.3,103.6 135.3,138.8 105.2,168.9 20.2,168.9
  text "DCS 1800" at 16.2,199.4 h5
  text "GSM 900" at 98.2,199.2 h5
  text "RF Section" at 59.4,199 h5
  text "IF Section" at 61.7,155.2 h5
  text "Power Supply" at 90.5,87.2 h5
  text "Mobile Jammer" at 4.8,19.8 h10
  text "Mohammad Sadr" at 4.796,15.254 h5
  text "Msadr471@gmail.com" at 4.826,11.514 h5
  text "Electronics.mihanblog.com" at 4.626,7.814 h5

## Text inside footprints (layer, text, board x,y; h text height)
D1: Top Overlay "+" at 61.906,26.794 h2 r270; Top Overlay "-" at 63.496,26.654 h2 r270
D2: Top Overlay "+" at 85.198,20.644 h1.27 r180; Top Overlay "-" at 100.438,20.644 h1.27 r180; Top Overlay "AC" at 93.326,20.644 h1.27 r180
H1: Top Overlay "HEATSINK" at 28.97,65.32 h1 r180; Top Overlay "HEATSINK" at 29.09,47.29 h1 r180
H2: Top Overlay "HEATSINK" at 28.97,91.52 h1 r180; Top Overlay "HEATSINK" at 29.09,73.49 h1 r180
H3: Top Overlay "HEATSINK" at 45.02,122.93 h1 r90; Top Overlay "HEATSINK" at 26.99,122.81 h1 r90
H4: Top Overlay "HEATSINK" at 81.93,72.48 h1; Top Overlay "HEATSINK" at 81.81,90.51 h1
H5: Top Overlay "HEATSINK" at 81.83,46.28 h1; Top Overlay "HEATSINK" at 81.71,64.31 h1
Reg1: Top Overlay "Adj (GND)" at 35.878,51.66 h0.76 r90; Top Overlay "In" at 35.903,55.394 h0.76 r90; Top Overlay "Out" at 35.903,57.68 h0.76 r90
Reg2: Top Overlay "Adj (GND)" at 35.878,77.86 h0.76 r90; Top Overlay "In" at 35.903,81.594 h0.76 r90; Top Overlay "Out" at 35.903,83.88 h0.76 r90
Reg3: Top Overlay "Adj (GND)" at 75.022,86.14 h0.76 r270; Top Overlay "In" at 74.997,82.406 h0.76 r270; Top Overlay "Out" at 74.997,80.12 h0.76 r270
Reg4: Top Overlay "Adj (GND)" at 31.26,116.022 h0.76; Top Overlay "In" at 34.994,115.997 h0.76; Top Overlay "Out" at 37.28,115.997 h0.76
Reg5: Top Overlay "Adj (GND)" at 74.922,59.94 h0.76 r270; Top Overlay "In" at 74.897,56.206 h0.76 r270; Top Overlay "Out" at 74.897,53.92 h0.76 r270
U1: Top Overlay "GND" at 108.062,115.148 h0.51
U2: Top Overlay "GND" at 91.882,128.048 h0.51
U3: Top Overlay "GND" at 56.532,136.578 h0.51
VCO1: Top Overlay "YYWW" at 109.86,182.78 h1; Top Overlay "0925-0970" at 107.51,184.55 h1; Top Overlay "CRYSTEK" at 108.54,188.09 h1
VCO2: Top Overlay "CRYSTEK" at 21.54,188.09 h1; Top Overlay "1785-1900" at 20.67,184.55 h1; Top Overlay "YYWW" at 22.86,182.78 h1